# Altium PCB Kicker2018_PCB.PcbDoc
Units mm, origin at the board's own origin, x right, y up, seen from the top; angles counter-clockwise.
Board outline 63.5 x 39.62 mm, 2 copper layers (Top Layer, Bottom Layer); 38 components, 26 nets, 135 pads, 5 vias.
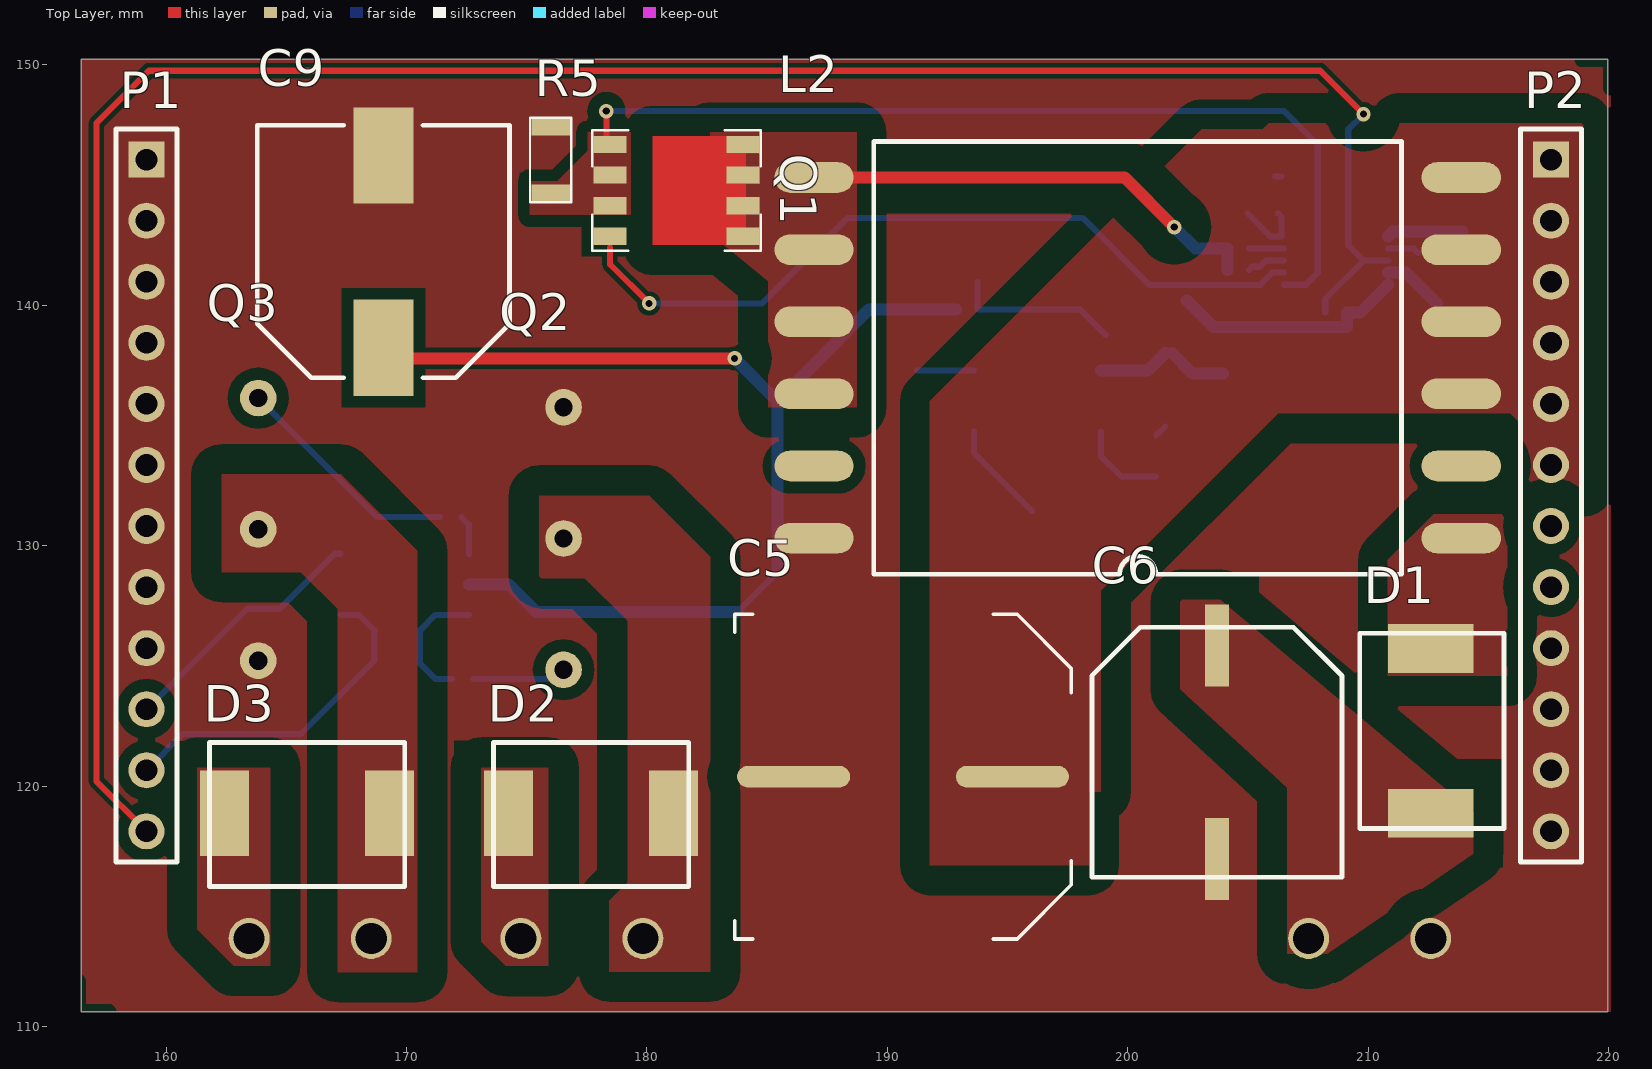
[diagram p0: Top Layer view]
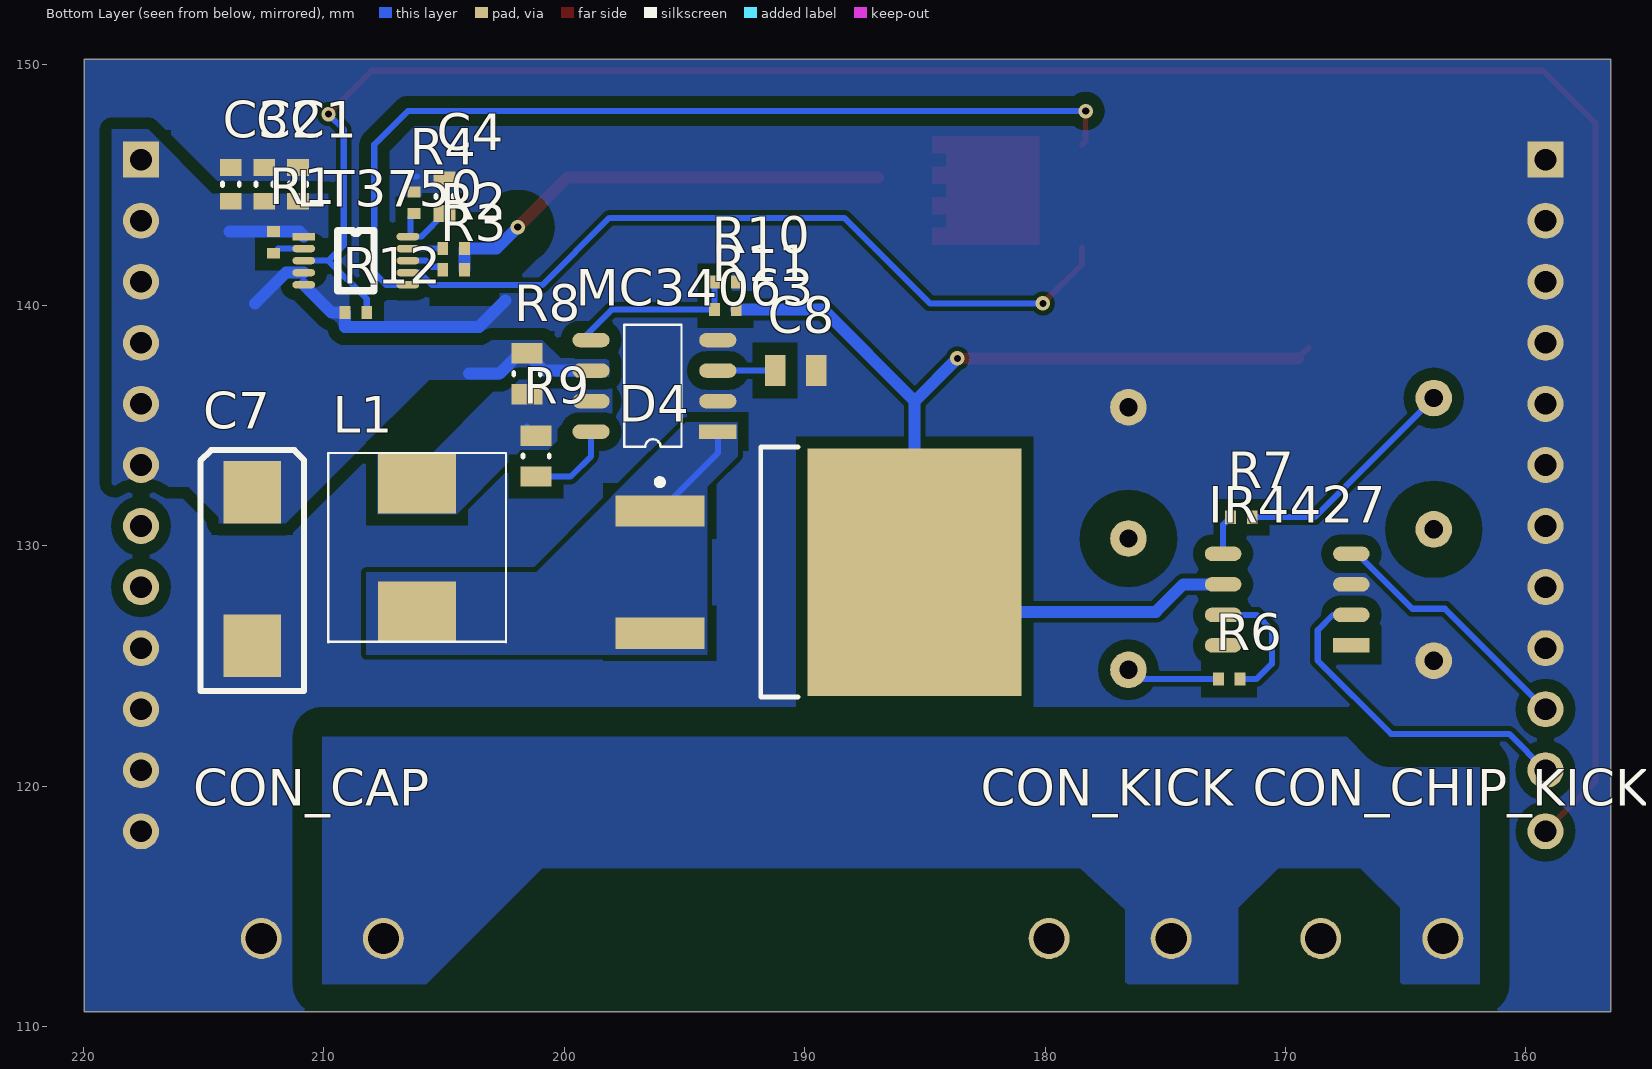
[diagram p1: Bottom Layer view, seen from below]
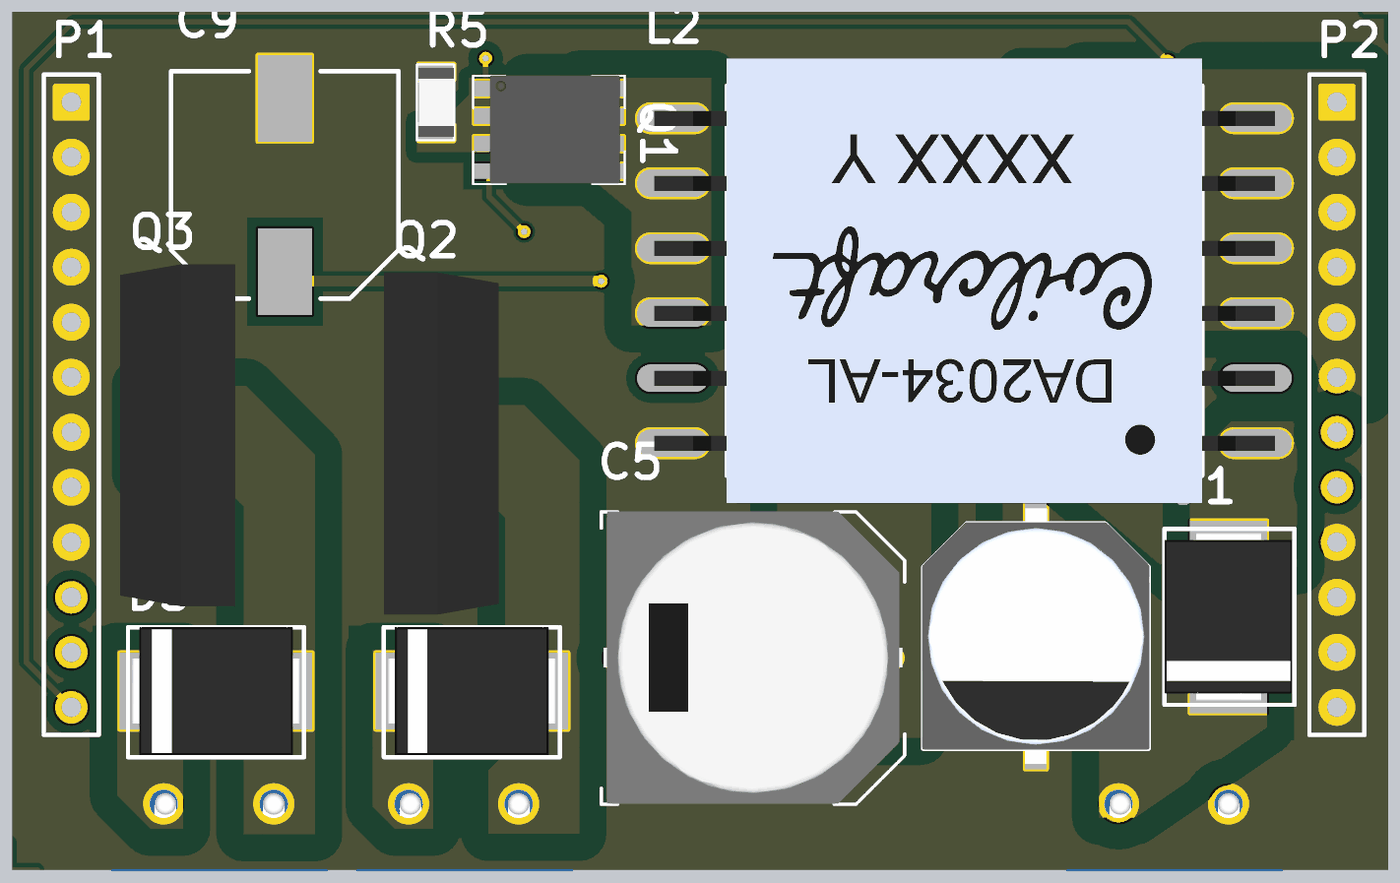
[diagram p2: 3D render of the assembled board from above, using the file's embedded part models]

## Layer stack, top to bottom
Top Solder: solder mask 0.0102, Solder Resist, Dk 3.5
Top Layer: signal copper 0.0356
Dielectric 1: dielectric 0.32, FR-4, Dk 4.8
Bottom Layer: signal copper 0.0356
Bottom Solder: solder mask 0.0102, Solder Resist, Dk 3.5

## Board outline
156.464,150.241 156.464,110.617 219.964,110.617 219.964,150.241

## Design rules (kind name [scope] priority, off if disabled: settings)
Clearance NetLT3750_6 [InNet('NetLT3750_6')] p1: gap=0.5 ignorepadtopadclearanceinfootprint=TRUE
Clearance "VCC Clearence" [InNet('VCC') vs OnLayer('Bottom Layer')] p2: gap=0.5 ignorepadtopadclearanceinfootprint=TRUE
Clearance HV [InNetClass('HV')] p3: gap=1.25 ignorepadtopadclearanceinfootprint=TRUE
Clearance [All] p4: gap=0.2 ignorepadtopadclearanceinfootprint=TRUE except(0.5: SMDPad-Poly THPad-Poly)
Height [All] p1: minheight=0 maxheight=50 prefheight=12.7
PlaneConnect [All] p1: planeconnectstyle=Direct reliefexpansion=0.508 reliefentries=4 reliefconductorwidth=0.254 reliefairgap=0.254
PolygonConnect [All] p1: connectstyle=Direct reliefconductorwidth=0.254 reliefentries=4 polygonreliefangle="90 Angle" airgapwidth=0.254
RoutingVias [All] p1: holewidth=0.711 width=1.27 viastyle="Through Hole" minholewidth=0.711 minwidth=1.27 maxholewidth=0.711 maxwidth=1.27
SolderMaskExpansion [All] p1: expansion=0.102
Width [All] p1: maxlimit=0.254 minlimit=0.254 preferedwidth=0.254
28 further rules are at their usual default settings.

## Classes and differential pairs
net class HV: Cap+ CHIP_KICK- KICK- NetD1_D1- NetL2_7 NetLT3750_6 VCC

## Components (designator, comment, footprint, x,y, rotation, side; value= is the part's Value field where it differs from the comment)
C1 "10uF" CAPC0603(1608)55_L 211.074,145.034 r90 bottom
C2 "10uF" CAPC0603(1608)55_L 212.471,145.034 r90 bottom
C3 "10uF" CAPC0603(1608)55_L 213.868,145.034 r90 bottom
C4 "100pF" CAPC0603(1608)55_L 204.978,144.526 r270 bottom
C5 "100uF" PCBComponent#1 190.649,120.396 r90 top
C6 "22uF" "CAP ALUM 22UF 250V" 203.708,121.412 r90 top
C7 "100uF" 7343-CAPPOL 212.979,129.032 r270 bottom
C8 "180pF" 0805-CAP 190.373,137.287 r0 bottom
C9 "220uF" NIC-CAPA2-10X10_V 169.037,142.24 r90 top
CON_CAP "OSTTA024163" "Term Block 2P" 210.058,113.665 r180 bottom
CON_CHIP_KICK "OSTTA024163" "Term Block 2P" 165.989,113.665 r180 bottom
CON_KICK "OSTTA024163" "Term Block 2P" 177.292,113.665 r180 bottom
D1 "ES3J" Diode 212.598,122.301 r90 top
D2 "ES3J" Diode 177.673,118.872 r0 top
D3 "ES3J" Diode 165.862,118.872 r0 top
D4 "DIODE SCHOTTKY 60V 30A D2PAK" DPAK254P1542X460-3N 189.42,128.905 r180 bottom
IR4427 "GATE DRIVER" IR4427 169.926,127.762 r0 bottom
L1 "100uH" Inductor 206.121,129.921 r90 bottom
L2 "DA2034 Transformer" "DA2034 Transformer" 213.868,130.319 r180 top
LT3750 "Flyback Regulator" LT3750 210.832,142.859 r180 bottom
MC34063 "Switching Voltage Regulator" MC34063 193.609,134.747 r0 bottom
P1 "Header 12" HDR1X12 159.184,146.062 r270 top
P2 "Header 12" HDR1X12 217.604,146.062 r270 top
Q1 "CSD18540Q5BT" PCBComponent#2 181.229,144.78 r180 top
Q2 "IRG4PC50FD" IRG4PC50FD 176.53,130.302 r90 top
Q3 "IRG4PC50FD" IRG4PC50FD 163.83,130.683 r270 top
R1 "100K" 0402-RES-HD 212.09,142.621 r270 bottom value=100k
R2 "33K" 0402-RES-HD 204.597,142.367 r180 bottom
R3 "42K2" 0402-RES-HD 204.597,141.478 r180 bottom value=42.2K
R4 "2K2" 0402-RES-HD 206.248,144.272 r90 bottom value=2.2K
R5 "15m" RES1206 176.022,146.05 r90 top
R6 "10R" 0402-RES-HD 172.339,124.46 r0 bottom value=10
R7 "10R" 0402-RES-HD 171.831,131.191 r180 bottom value=10
R8 "1R" 0805-RES 201.549,137.16 r270 bottom
R9 "160R" 0805-RES 201.168,133.731 r90 bottom value=160
R10 "1K" 0402-RES-HD 193.294,140.97 r0 bottom
R11 "11K1" 0402-RES-HD 193.294,139.827 r0 bottom value=11k1
R12 "1K" 0402-RES-HD 208.661,139.7 r180 bottom

## Footprints (in the part's own frame and the unit in brackets; to place one, negate y for a bottom-side part, rotate by r counter-clockwise, add the part's x,y. Pads: shape width x height; smd on the part's side, far side on the other; paste and mask are expansions set on the pad)
0402-RES-HD [mm] "Chip Resistor, Body 1.0x0.5mm, IPC High Density"
  rect 0.45x0.55 smd: 1(-0.45,0) 2(0.45,0)
  body extent -0.52,-0.27 0.53,0.28, height 0.4
0805-CAP [mm] "Chip Resistor, Body 2.0x1.3mm, IPC High Density"
  rect 0.85x1.3 smd: 1(-0.85,0) 2(0.85,0)
  body extent -1.1,-0.67 1.1,0.68, height 0.7
0805-RES [mm] "Chip Resistor, Body 2.0x1.3mm, IPC High Density"
  rect 0.85x1.3 smd: 1(-0.85,0) 2(0.85,0)
  silkscreen extent -0.05,-0.55 0.05,0.55, body extent -1.1,-0.67 1.1,0.68, height 0.7
7343-CAPPOL [mm] "SMT Capacitor, 2 Leads, Body 7.3x4.3mm"
  rect 2.6x2.4 smd: 1(-3.202,0.007) 2(3.198,0.007)
  silkscreen extent -4.95,-2.15 5.08,2.16, body extent -3.49,-2.03 3.51,2.04, height 4.05
"CAP ALUM 22UF 250V" [mm] "22uF"
  rect 3.4x1 smd: Cap+(4.445,0) Cap-(-4.445,0)
  silkscreen extent -5.2,-5.2 5.2,5.2, body extent -8.64,-5.25 5.9,5.46, height 10.3
CAPC0603(1608)55_L [mm] "Chip Capacitor, Body 1.6x0.8mm, Height 0.55mm, IPC High Density"
  rect 0.7x0.9 smd: 1(-0.7,0) 2(0.7,0)
  silkscreen extent -0.05,-0.35 0.05,0.35, body extent -0.87,-0.47 0.88,0.48, height 0.55
"DA2034 Transformer" [mm]
  oval 3.3x1.27 smd: 1(0,0) 2(0,-3) 3(0,-6) 4(0,-9) 5(0,-12) 6(0,-15) 7(26.92,-15) 8(26.92,-12) 9(26.92,-9) 10(26.92,-6) 11(26.92,-3) 12(26.92,0)
  silkscreen extent 2.48,-16.5 24.44,1.5, body extent -0.86,-17.78 27.79,2.79, height 11.18
Diode [mil]
  rect 80x140 smd: D1+(-135,0) D1-(135,0)
  silkscreen extent -160,-120 160,116, body extent -154,-116 154,116, height 95
DPAK254P1542X460-3N [mm] "D2-PAK, 3-Pads, Body 7,77x8,56mm (max), IPC Medium Density"
  rect 3.7x1.3 smd: A(-6.6,-2.54) A(-6.6,2.54)
  rect 8.9x10.3 smd: K(4,0)
  silkscreen extent -6.73,-5.2 -0.85,5.2, body extent -6.54,-5.2 8.89,5.2, height 4.63
HDR1X12 [mm] "Connector; Header; 12 Position"
  rect 1.5x1.5 hole 0.9: 1(0,0)
  round 1.5 hole 0.9: 2(2.54,0) 3(5.08,0) 4(7.62,0) 5(10.16,0) 6(12.7,0) 7(15.24,0) 8(17.78,0) 9(20.32,0) 10(22.86,0) 11(25.4,0) 12(27.94,0)
  silkscreen extent -1.27,-1.27 29.21,1.27
Inductor [mm]
  rect 2.5x3.25 smd: 1(-2.667,0) 2(2.667,0)
  silkscreen extent -3.94,-3.7 3.94,3.7, body extent -3.65,-3.65 3.65,3.65, height 4.2
IR4427 [mm]
  rect 1.52x0.6 smd: 1(-2.667,1.905)
  oval 1.52x0.6 smd: 2(-2.667,0.635) 3(-2.667,-0.635) 4(-2.667,-1.905) 5(2.667,-1.905) 6(2.667,-0.635) 7(2.667,0.635) 8(2.667,1.905)
  body extent -3,-2.45 3,2.45, height 1.75
IRG4PC50FD [mil] "IGBT Transistors 600V FAST 1-8 KHZ COPACK IGBT"
  round 60 hole 30: 1(0,0) 2(-215,0) 3(215,0)
  body extent -311,-94 311,115, height 1344
LT3750 [mm]
  rect 0.95x0.305 smd: 1(0,0)
  oval 0.95x0.305 smd: 2(0,-0.5) 3(0,-1) 4(0,-1.5) 5(0,-2) 6(4.33,-2) 7(4.33,-1.5) 8(4.33,-1) 9(4.33,-0.5) 10(4.33,0)
  silkscreen extent 1.41,-2.25 2.92,0.25, body extent -0.29,-2.52 4.61,0.48, height 1.15
MC34063 [mm]
  rect 1.55x0.6 smd: 1(0,0)
  oval 1.55x0.6 smd: 2(0,-1.27) 3(0,-2.54) 4(0,-3.81) 5(5.273,-3.81) 6(5.273,-2.54) 7(5.273,-1.27) 8(5.273,0)
  silkscreen extent 1.51,-4.44 3.89,0.64, body extent -0.38,-4.32 5.6,0.58, height 1.58
NIC-CAPA2-10X10_V [mm] "Aluminum Electrolytic Capacitor, Diameter 10mm, Height 10.8mm, Pitch 8mm"
  rect 4x2.5 smd: 1(-4,0) 2(4,0)
  silkscreen extent -5.25,-5.25 5.25,5.25, body extent -5,-5 5,5, height 10.8
PCBComponent#1 [mm]
  oval 0.9x4.7 smd: 1(0,4.55) 2(0,-4.55)
  silkscreen extent -6.75,-7 6.75,7, body extent -6.73,-6.9 6.77,6.9, height 13.5
PCBComponent#2 [mm]
  rect 1.372x0.711 smd: 1(2.769,-1.905) 2(2.769,-0.635) 3(2.769,0.635) 4(2.769,1.905) 5(-2.769,1.905) 6(-2.769,0.635) 7(-2.769,-0.635) 8(-2.769,-1.905)
  Top Layer region: -3.454,2.261 0.991,2.261 0.991,-2.261 -3.454,-2.261 -3.454,-1.549 -2.87,-1.549 -2.87,-0.991 -3.454,-0.991 -3.454,-0.279 -2.87,-0.279 -2.87,0.279 -3.454,0.279 -3.454,0.991 -2.87,0.991 -2.87,1.549 -3.454,1.549
  silkscreen extent -3.5,-2.5 3.5,2.5, body extent -3.28,-2.53 2.72,2.47, height 1.1
RES1206 [mil]
  rect 30x65 smd: 1(-55,0) 2(55,0)
  silkscreen extent -69,-33 69,35, body extent -63,-33 63,33, height 21
"Term Block 2P" [mm]
  round 1.7 hole 1.3: 1(-2.54,0) 2(2.54,0)
  body extent -5.64,-3.1 4.96,4.5, height 10

## Part data
C1 C2 C3: library part C0603-10uF-16V-1, "CAP CER 10UF 16V X5R 0603", Part No=EMK107BBJ106MA-T, Cod EMS=05.281.019.592
C4: library part CC0603--1, "CAP CER 100PF 50V NP0 0603", Part No=GRM1885C1H101JA01D
C5: library part CA-100uF-3, "CAP ALUM 100UF 20% 80V SMD"
C6: library part "CAP ALUM 22UF 250V"
C7: library part CT2917-100uF-1, "CAP TANT 100uF 25V 20% ESR = 30mOhm @ 100 kHz", Part No=T521X107M025ATE030
C8: library part CC0805-180pF-2, "CAP CER 180PF 50V NP0 0805", Part No=C0805C181K5GACTU, Cod EMS=05.281.019.399
C9: library part CA-220uF-1, "CAP ALUM 220uF 20% 50V  ESR = 0,18 ohms  Radial DIA 10mm HEIGH 10,2mm", Part No=EEEFK1H221P, Cod EMS=05.281.030.094
CON_CAP CON_CHIP_KICK CON_KICK: library part "Term Block 2P", "2 Position Wire to Board Terminal Block Horizontal with Board 0.200\" (5.08mm) Through Hole"
D4: library part STPS30M60SG-TR-1, Part No=STPS30M60SG-TR
IR4427: library part IR4427, "IC DRIVER DUAL LOW SIDE 8-SOIC"
L1: library part Inductor, "Fixed Inductors 100uH 0.86A SMT"
LT3750: library part LT3750
MC34063: library part MC34063
P1 P2: "Header, 12-Pin", LatestRevisionDate=17-Jul-2002, LatestRevisionNote="Re-released for DXP Platform.", Publisher="Altium Limited"
Q1: library part CSD18540Q5BT-1, "MOSFET N-CH 60V 100A 8VSON", Part No=CSD18540Q5BT
Q2 Q3: "IGBT Transistors 600V FAST 1-8 KHZ COPACK IGBT", ComponentLink2URL=http://www.irf.com/product-info/datasheets/data/irg4pc50fd.pdf, DatasheetVersion=2000, Published=28-dez-2017, Publisher=RoboIME
R1: library part R0402-100K-11, "RES 100K OHM 1/10W 1% 0402 SMD 1", Part No=ERJ-2GEJ104X, Cod EMS=05.280.029.504, Family=ERJ-2GE....X, Family Description="RESISTOR FILME ESPESSO 0R-1M / 1/10W / 5% /  0402. P/N: ERJ-2GE....X – PANASONIC ELECTRONIC COMPONENTS."
R2: library part R0402-33K-7, "RES 33K OHM 1/10W 1% 0402 SMD", Part No=ERJ-2RKF3302X, Cod EMS=05.280.029.535, Family=ERJ-2RKF....X, Family Description="RESISTOR FILME ESPESSO 10R-1M / 1/10W / 1% / 0402. P/N: ERJ-2RKF....X – PANASONIC ELECTRONIC COMPONENTS."
R3: library part RESISTOR, "RES 42.2K OHM 1/10W 1% 0402 SMD", Part No=ERJ-2RKF4222X
R4: library part R0402-2K2-5, "RES 2.2K OHM 1/10W 1% 0402 SMD", Part No=ERJ-2RKF2201X, Cod EMS=05.280.029.541, Family=ERJ-2RKF....X, Family Description="RESISTOR FILME ESPESSO 10R-1M / 1/10W / 1% / 0402. P/N: ERJ-2RKF....X – PANASONIC ELECTRONIC COMPONENTS."
R5: library part Res2, "Resistor", LatestRevisionDate=17-Jul-2002, LatestRevisionNote="Re-released for DXP Platform.", PackageDescription="Axial Device, Thru-Hole; 2 Leads; 0.4 in Pin Spacing", PackageReference=AXIAL-0.4, Published=8-Jun-2000, Publisher="Altium Limited"
R6 R7: library part R0402-10R-6, "RES 10 OHM 1/10W 1% 0402 SMD", Part No=ERJ-2RKF10R0X, Cod EMS=05.280.029.523, Family=ERJ-2RKF....X, Family Description="RESISTOR FILME ESPESSO 10R-1M / 1/10W / 1% / 0402. P/N: ERJ-2RKF....X – PANASONIC ELECTRONIC COMPONENTS."
R8: library part R0805-1R-1%-1, "RES SMD 1 OHM 1% 1/8W 0805", Part No=CRCW08051R00FKEA, Cod EMS=05.280.029.391
R9: library part R0805-160R-5, "RES 160 OHM 1/8W .5% 0805 SMD", Part No=ERA-6AED161V, Cod EMS=05.280.029.516, Family=ERA-6AED...V
R10 R12: library part R0402-1K-A.9, "RES 1K OHM 1/10W 1% 0402 SMD", Part No=ERJ-2RKF1001X, Cod EMS=05.280.029.527, Family=ERJ-2RKF....X, Family Description="RESISTOR FILME ESPESSO 10R-1M / 1/10W / 1% / 0402. P/N: ERJ-2RKF....X – PANASONIC ELECTRONIC COMPONENTS."
R11: library part R0402-11K1-1, "RES 11.1 KOHM 1/16W 0.1% 0402 SMD", Part No=TNPW040211K1BEED

## Via types
v1: diameter 0.6, hole 0.3, Top Layer to Bottom Layer, 5 vias

## Nets (pads, with @x,y where several pads share a name; then routed paths per layer and width w, separated by ;. In a path a pad name is that pad's centre, name@x,y a point inside that pad or via, vN(x,y) a via of type N, cw(c..) or ccw(c..) an arc to the next point about the centre after c; other vN are vias at no path point)
Cap+: C6.Cap+ CON_CAP.2 CON_CHIP_KICK.2 CON_KICK.2 D1.D1+ D2.D1+ D3.D1+
Cap-: C1.2 C2.2 C3.2 C4.1 C5.1 C6.Cap- C7.2 C8.1 C9.2 CON_CAP.1 IR4427.3 L2.12 LT3750.5 MC34063.2 MC34063.4 P1.1 P1.2 P1.3 P1.4 P1.5 P1.6 P1.7 P1.8 P1.9 P2.9 P2.10 P2.11 P2.12 Q2.3 Q3.3 R4.2 R5.2 R10.1 R12.1 | length 10.2
  Bottom Layer w0.254: 206.121,145.353 206.395,145.353
  Bottom Layer w0.5: 202.438,140.208 203.548,139.098 209.111,139.098 R12.1 209.673,139.7 LT3750.5
CHARGE_ENABLE: LT3750.3 P1.12 R12.2 | length 95.1
  Top Layer w0.254: P1.12 157.099,120.207 157.099,147.574 159.284,149.759 208,149.759 v1(209.804,147.955)
  Bottom Layer w0.254: R12.2 208.211,140.266 209.804,141.859 ; v1(209.804,147.955) 209.169,147.32 209.169,142.494 209.804,141.859 ; LT3750.3 209.804,141.859
CHIP_KICK: Q3.2 R7.2 | length 9.6
  Bottom Layer w0.254: Q3.2 168.783,131.191 R7.2
CHIP_KICK-: CON_CHIP_KICK.1 D3.D1- Q3.1
CHIP_KICK_SIGNAL: IR4427.4 P1.10 | length 10.8
  Bottom Layer w0.254: P1.10 163.363,127.381 164.719,127.381 167.005,129.667 IR4427.4
KICK: Q2.2 R6.2 | length 4
  Bottom Layer w0.254: R6.2 176.276,124.46 Q2.2@176.657,124.841
KICK-: CON_KICK.1 D2.D1- Q2.1
KICK_SIGNAL: IR4427.2 P1.11 | length 14.3
  Bottom Layer w0.254: P1.11 160.696,122.174 165.608,122.174 168.656,125.222 168.656,126.492 168.021,127.127 IR4427.2
NetC4_2: C4.2 LT3750.10 R4.1 | length 2.8
  Bottom Layer w0.254: C4.2 205.945,142.859 206.395,142.859 206.395,143.675 R4.1
NetC8_2: C8.2 MC34063.3 | length 2.4
  Bottom Layer w0.254: C8.2 MC34063.3
NetD1_D1-: D1.D1- L2.1
NetD4_A: D4.A L1.1 MC34063.1 | length 4.3
  Bottom Layer w0.254: MC34063.1 193.609,133.856 D4.A@196.02,131.445
NetIR4427_5: IR4427.5 R7.1 | length 1.7
  Bottom Layer w0.254: R7.1 172.593,130.879 IR4427.5
NetIR4427_7: IR4427.7 R6.1 | length 5.3
  Bottom Layer w0.254: R6.1 171.196,124.46 170.561,125.095 170.561,126.492 171.196,127.127 IR4427.7
NetL1_2: L1.2 MC34063.7 R8.2 R9.2 | length 0.5
  Bottom Layer w0.254: R9.2 R9.2@201.549,134.962
NetL2_7: L2.7 L2.8 L2.9 L2.10 Q1.5 Q1.6 Q1.7 Q1.8 R2.2 R3.2 | length 19.3
  Top Layer w0.5: L2.7 199.867,145.319 v1(201.93,143.256)
  Bottom Layer w0.5: v1(201.93,143.256) 202.819,142.367 R2.2 R3.2
NetLT3750_2: LT3750.2 R1.2 | length 1.3
  Bottom Layer w0.254: LT3750.2 211.902,142.359 R1.2
NetLT3750_6: LT3750.6 Q1.1 Q1.2 Q1.3 R5.1 | length 38.6
  Top Layer w0.254: v1(178.308,148.082) 178.308,146.837 Q1.1
  Bottom Layer w0.254: v1(178.308,148.082) 206.502,148.082 207.899,146.685 207.899,141.351 207.407,140.859 LT3750.6
NetLT3750_7: LT3750.7 Q1.4 | length 32.3
  Top Layer w0.254: 178.46,142.412 178.46,141.707 v1(180.086,140.081)
  Bottom Layer w0.254: v1(180.086,140.081) 184.785,140.081 188.341,143.637 198.12,143.637 200.914,140.843 205.486,140.843 206.002,141.359 LT3750.7
NetLT3750_8: LT3750.8 R3.1 | length 1.6
  Bottom Layer w0.254: R3.1 205.174,141.605 205.486,141.605 205.74,141.859 LT3750.8
NetLT3750_9: LT3750.9 R2.1 | length 1.5
  Bottom Layer w0.254: R2.1 205.055,142.359 LT3750.9
NetMC34063_5: MC34063.5 R10.2 R11.2 | length 6.9
  Bottom Layer w0.254: R10.2 R11.2 198.019,139.827 MC34063.5@199.085,138.76
NetMC34063_8: MC34063.8 R9.1 | length 3.7
  Bottom Layer w0.254: MC34063.8 198.882,133.731 199.732,132.881 R9.1
VCC: C1.1 C2.1 C3.1 C5.2 C7.1 L2.3 L2.4 L2.5 L2.6 LT3750.1 LT3750.4 MC34063.6 P2.1 P2.2 P2.3 P2.4 P2.5 P2.6 R1.1 R8.1 | length 11.5
  Bottom Layer w0.254: R8.1 R8.1@201.842,138.01
  Bottom Layer w0.5: MC34063.6 200.826,137.287 R8.1 ; R8.1@201.842,138.01 202.692,137.16 203.962,137.16 ; LT3750.4 211.574,141.359 212.852,140.081 ; LT3750.1 210.832,142.887 211.016,143.071 R1.1 213.926,143.071
Vs: C9.1 D4.K IR4427.6 R11.1 | length 47.4
  Top Layer w0.254: C9.1 C9.1@169.482,137.795
  Top Layer w0.5: C9.1@169.482,137.795 v1(183.642,137.795)
  Bottom Layer w0.254: D4.K@183.769,127.254 D4.K
  Bottom Layer w0.5: IR4427.6 174.244,128.397 175.387,127.254 D4.K@183.769,127.254 ; v1(183.642,137.795) 185.42,136.017 ; D4.K 185.42,136.017 ; R11.1 189.23,139.827 185.42,136.017
pads on no net: IR4427.1 IR4427.8 L2.2 L2.11 P2.7 P2.8

## Polygon pours and split planes (outlines as drawn)
NetLT3750_6 on Top Layer "NETLT3750_6_L01_P000" (solid, remove dead copper, pour order 0): 179.324,143.764 175.133,143.764 175.133,145.161 176.276,145.161 177.546,146.431 177.546,147.193 179.324,147.193
Cap- on Top Layer "GND" (solid, remove dead copper, pour order 12): 156.464,110.617 156.464,150.241 220.091,150.241 220.091,110.617
VCC on Top Layer "VCC Top" (solid, remove dead copper, pour order 4): 218.948,132.461 216.535,132.461 216.535,134.874 215.9,135.509 206.248,135.509 198.374,127.635 198.374,116.713 192.405,116.713 191.77,116.713 191.77,136.017 203.073,147.32 218.948,147.32
Cap+ on Top Layer "HV Cap+" (solid, remove dead copper, pour order 11): 164.338,112.522 164.338,120.777 161.29,120.777 161.29,114.046 162.814,112.522
Cap+ on Top Layer "HV Cap+" (solid, remove dead copper, pour order 10): 175.895,112.522 175.895,120.777 173.101,120.777 173.101,113.538 174.117,112.522
CHIP_KICK- on Top Layer "HV Chip Kick-" (solid, remove dead copper, pour order 9): 170.434,112.268 170.434,129.794 167.259,132.969 162.306,132.969 162.306,128.905 165.608,128.905 167.132,127.381 167.132,112.268
KICK- on Top Layer "HV Kick-" (solid, remove dead copper, pour order 8): 178.435,112.285 182.626,112.285 182.626,129.54 180.086,132.08 175.514,132.08 175.514,128.651 177.419,128.651 179.197,126.873 179.197,116.001 178.435,115.239
NetL2_7 on Top Layer "HV L2_7" (solid, remove dead copper, pour order 7): 188.722,147.193 188.722,135.763 185.039,135.763 185.039,141 182.626,142.987 182.626,147.193
NetD1_D1- on Top Layer "HV D1-" (solid, remove dead copper, pour order 6): 215.773,131.318 215.773,124.587 210.82,124.587 210.82,129.413 212.725,131.318
Cap+ on Top Layer "Cap+" (solid, remove dead copper, pour order 5): 214.376,118.922 214.376,117.194 208.29,113.03 206.629,113.03 206.629,119.927 202.184,124.03 202.184,127.762 203.854,127.762
VCC on Top Layer "VCC Top" (solid, remove dead copper, pour order 3): 218.821,132.207 218.694,132.334 216.408,132.334 216.408,135.509 215.773,136.144 204.978,136.144 198.882,130.048 198.882,119.761 192.913,119.761 192.405,120.269 192.405,134.112 205.867,147.574 218.948,147.574
Cap- on Bottom Layer "GND" (solid, remove dead copper, pour order 15): 156.464,150.241 156.464,110.617 219.964,110.617 219.964,150.241
VCC on Bottom Layer "VCC Bottom" (solid, remove dead copper, pour order 2): 218.821,132.461 215.646,132.461 214.376,131.191 214.376,130.937 211.582,130.937 206.248,136.271 205.613,136.906 198.12,136.906 198.12,137.795 200.152,137.795 200.914,138.557 209.042,138.557 210.058,139.573 210.058,142.24 208.661,143.637 208.661,144.653 214.63,144.653 217.297,147.32 218.821,147.32
Cap+ on Bottom Layer "HV Cap+" (solid, remove dead copper, pour order 14): 210.058,111.76 210.058,122.047 161.925,122.047 161.925,111.76 165.227,111.76 165.227,114.935 166.878,116.586 170.307,116.586 171.958,114.935 171.958,111.76 176.657,111.76 176.657,114.863 178.544,116.586 200.914,116.586 205.74,111.76
NetD4_A on Bottom Layer "NETD4_A_L02_P013" (solid, remove dead copper, pour order 13): 208.239,125.476 194.056,125.476 194.056,132.461 192.786,133.731 192.786,135.128 194.945,135.128 201.168,128.905 208.239,128.905
NetL1_2 on Bottom Layer "NETL1_2_L02_P001" (solid, remove dead copper, pour order 1): 200.533,136.906 202.438,136.906 205.486,133.858 207.772,133.858 207.772,131.318 204.47,131.318 201.803,133.985 200.66,133.985 200.279,134.366 200.279,134.874 199.644,135.509 197.993,135.509 197.993,136.525 200.152,136.525